# EAGLE board multiplication (EAGLE 9.2.2)
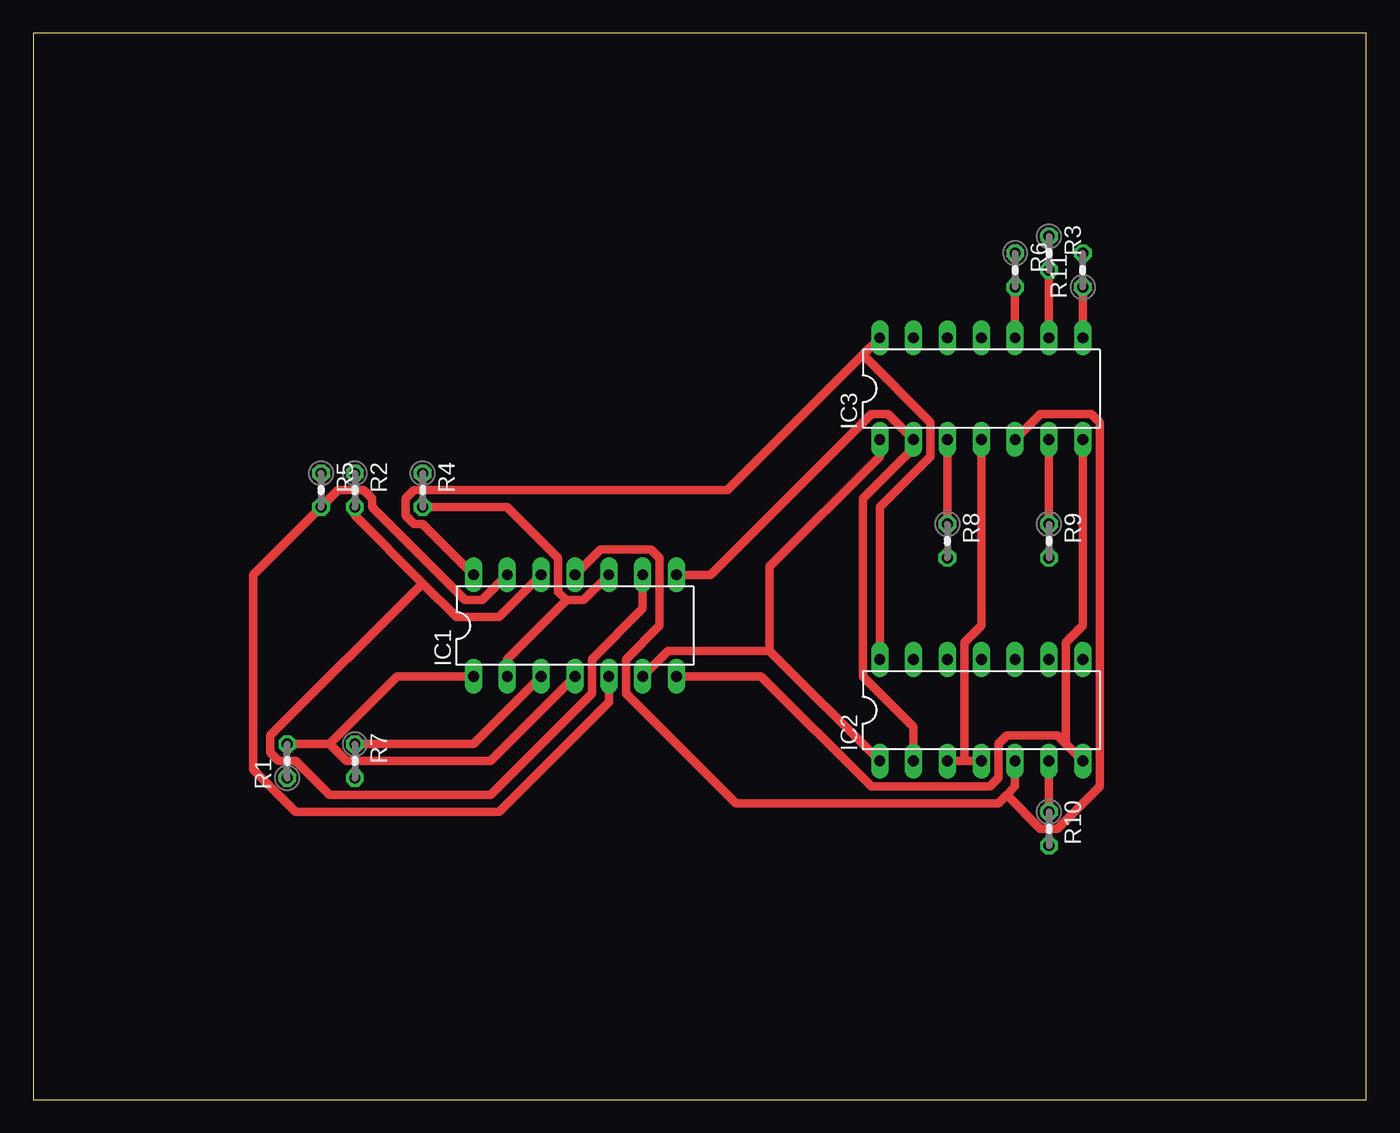
[diagram p0: board, top side]

Size 100 x 80 mm. Coordinates in mm from the lower left corner, seen from the top.
Outline: 0,0 100,0 100,80 0,80 0,0
Copper layers (1*16): Top 0.035mm / dielectric 1.5mm / Bottom 0.035mm
Design rules "default *": minimum track width 25mil, minimum drill 0.35mm, track to track 25mil, track to pad 6mil, pad to pad 6mil, via to via 6mil, smd to smd 6mil, copper to edge 40mil, drill to drill 6mil, minimum pad ring 10mil, minimum via ring 8mil, stop-mask expansion 4mil, vias tented up to drill 0mil, thermal gap 10mil

## Footprints (pad centres in the part's own frame; a part is rotated, then mirrored left to right if it is on the bottom)
DIL14 = drill 0.813 long: 1 -7.62,-3.81; 2 -5.08,-3.81; 3 -2.54,-3.81; 4 0,-3.81; 5 2.54,-3.81; 6 5.08,-3.81; 7 7.62,-3.81; 8 7.62,3.81; 9 5.08,3.81; 10 2.54,3.81; 11 0,3.81; 12 -2.54,3.81; 13 -5.08,3.81; 14 -7.62,3.81
0204V = drill 0.813 octagon: 1 -1.27,0; 2 1.27,0

## Placement (x,y rotation side)
IC1  74LS08N  [DIL14]  40.64,35.56 0 top
IC2  74LS08N  [DIL14]  71.12,29.21 0 top
IC3  74LS86N  [DIL14]  71.12,53.34 0 top
R1  10  [0204V]  19.05,25.4 90 top
R2  10  [0204V]  24.13,45.72 270 top
R3  10  [0204V]  76.2,63.5 270 top
R4  10  [0204V]  29.21,45.72 270 top
R5  10  [0204V]  21.59,45.72 270 top
R6  10  [0204V]  73.66,62.23 270 top
R7  10  [0204V]  24.13,25.4 270 top
R8  10  [0204V]  68.58,41.91 270 top
R9  10  [0204V]  76.2,41.91 270 top
R10  10  [0204V]  76.2,20.32 270 top
R11  10  [0204V]  78.74,62.23 90 top

## Library data of the parts
IC1-IC3 = 74xx-eu
R1-R11 = rcl; SPICEPREFIX: R

## Nets
A0: IC1.1 IC1.4 R1.2
A1: IC1.9 IC1.12 R2.2
A2: IC3.9 R3.2
B0: IC1.2 IC1.10 R4.2
B1: IC1.5 IC1.13 R5.2
B2: IC3.10 R6.2
GND: IC1.7 IC2.7 IC3.7
N$1: IC1.3 R7.1
N$2: IC3.8 R11.1
N$3: IC2.6 R10.1
N$4: R1.1
N$5: R2.1
N$6: R3.1
N$7: R4.1
N$8: R5.1
N$9: R6.1
N$10: R7.2
N$11: R8.2
N$12: R9.2
N$13: R10.2
N$14: R11.2
N$16: IC1.6 IC2.1 IC3.1
N$17: IC1.8 IC2.2 IC3.2
N$18: IC3.3 R8.1
N$19: IC2.3 IC2.4 IC3.4
N$20: IC1.11 IC2.5 IC3.5
N$22: IC3.6 R9.1
VCC: IC1.14 IC2.14 IC3.14

## Tracks (layer width: path | path; a pad name or v marks a point on that pad's centre or on a via)
A0
  Top 0.635: 22.23,26.67 R1.2 | 22.23,26.67 27.3,31.75 IC1.1 | IC1.4 34.29,25.4 23.5,25.4 22.23,26.67
A1
  Top 0.635: R2.2 24.13,43.81 29.21,38.73 | 29.21,38.73 31.75,36.2 34.92,36.2 IC1.12 | IC1.9 45.72,36.83 41.91,33.02 41.91,30.48 34.29,22.86 22.23,22.86 19.68,25.4 18.41,25.4 17.78,26.04 17.78,27.3 29.21,38.73
A2
  Top 0.635: R3.2 IC3.9
B0
  Top 0.635: R4.2 35.56,44.45 39.37,40.64 39.37,38.1 40.01,37.47 | 40.01,37.47 41.27,37.47 IC1.10 | IC1.2 35.56,33.02 40.01,37.47
B1
  Top 0.635: IC1.5 43.18,29.84 34.92,21.59 19.68,21.59 16.51,24.77 16.51,39.37 R5.2 22.86,45.72 24.77,45.72 25.4,45.09 25.4,44.45 32.38,37.47 33.66,37.47 IC1.13
B2
  Top 0.635: R6.2 IC3.10
GND
  Top 0.635: IC1.7 54.61,31.75 62.87,23.5 71.75,23.5 72.39,24.13 72.39,26.67 73.03,27.3 76.83,27.3 77.47,26.67 | IC2.7 77.47,26.67 | IC3.7 78.74,35.56 77.47,34.29 77.47,26.67
N$1
  Top 0.635: R7.1 33.02,26.67 IC1.3
N$2
  Top 0.635: R11.1 IC3.8
N$3
  Top 0.635: IC2.6 R10.1
N$16
  Top 0.635: IC1.6 47.62,33.66 55.24,33.66 | IC2.1 55.24,33.66 | IC3.1 63.5,48.26 55.24,40.01 55.24,33.66
N$17
  Top 0.635: IC1.8 50.8,39.37 62.87,51.44 64.14,51.44 IC3.2 66.04,48.9 62.23,45.09 62.23,31.75 66.04,27.94 IC2.2
N$18
  Top 0.635: IC3.3 R8.1
N$19
  Top 0.635: IC2.4 69.85,25.4 | 69.85,25.4 IC2.3 | IC3.4 71.12,35.56 69.85,34.29 69.85,25.4
N$20
  Top 0.635: IC1.11 42.55,41.27 46.35,41.27 46.99,40.64 46.99,35.56 44.45,33.02 44.45,30.48 52.7,22.23 72.39,22.23 73.03,22.86 | 73.03,22.86 73.66,23.5 IC2.5 | IC3.5 75.56,51.44 79.38,51.44 80.01,50.8 80.01,23.5 76.83,20.32 75.56,20.32 73.03,22.86
N$22
  Top 0.635: IC3.6 R9.1
VCC
  Top 0.635: IC1.14 29.21,43.18 28.57,43.18 27.94,43.81 27.94,45.09 28.57,45.72 52.07,45.72 62.23,55.88 | IC3.14 62.23,55.88 | IC2.14 63.5,44.45 67.31,48.26 67.31,50.8 62.23,55.88